# Altium PCB STM32f0DemoBoard.PcbDoc
Units mm, origin at the board's own origin, x right, y up, seen from the top; angles counter-clockwise.
Board outline 36.2 x 24.5 mm, 2 copper layers (Top Layer, Bottom Layer), stack 1.671 mm thick; 17 components, 31 nets, 93 pads, 13 vias.
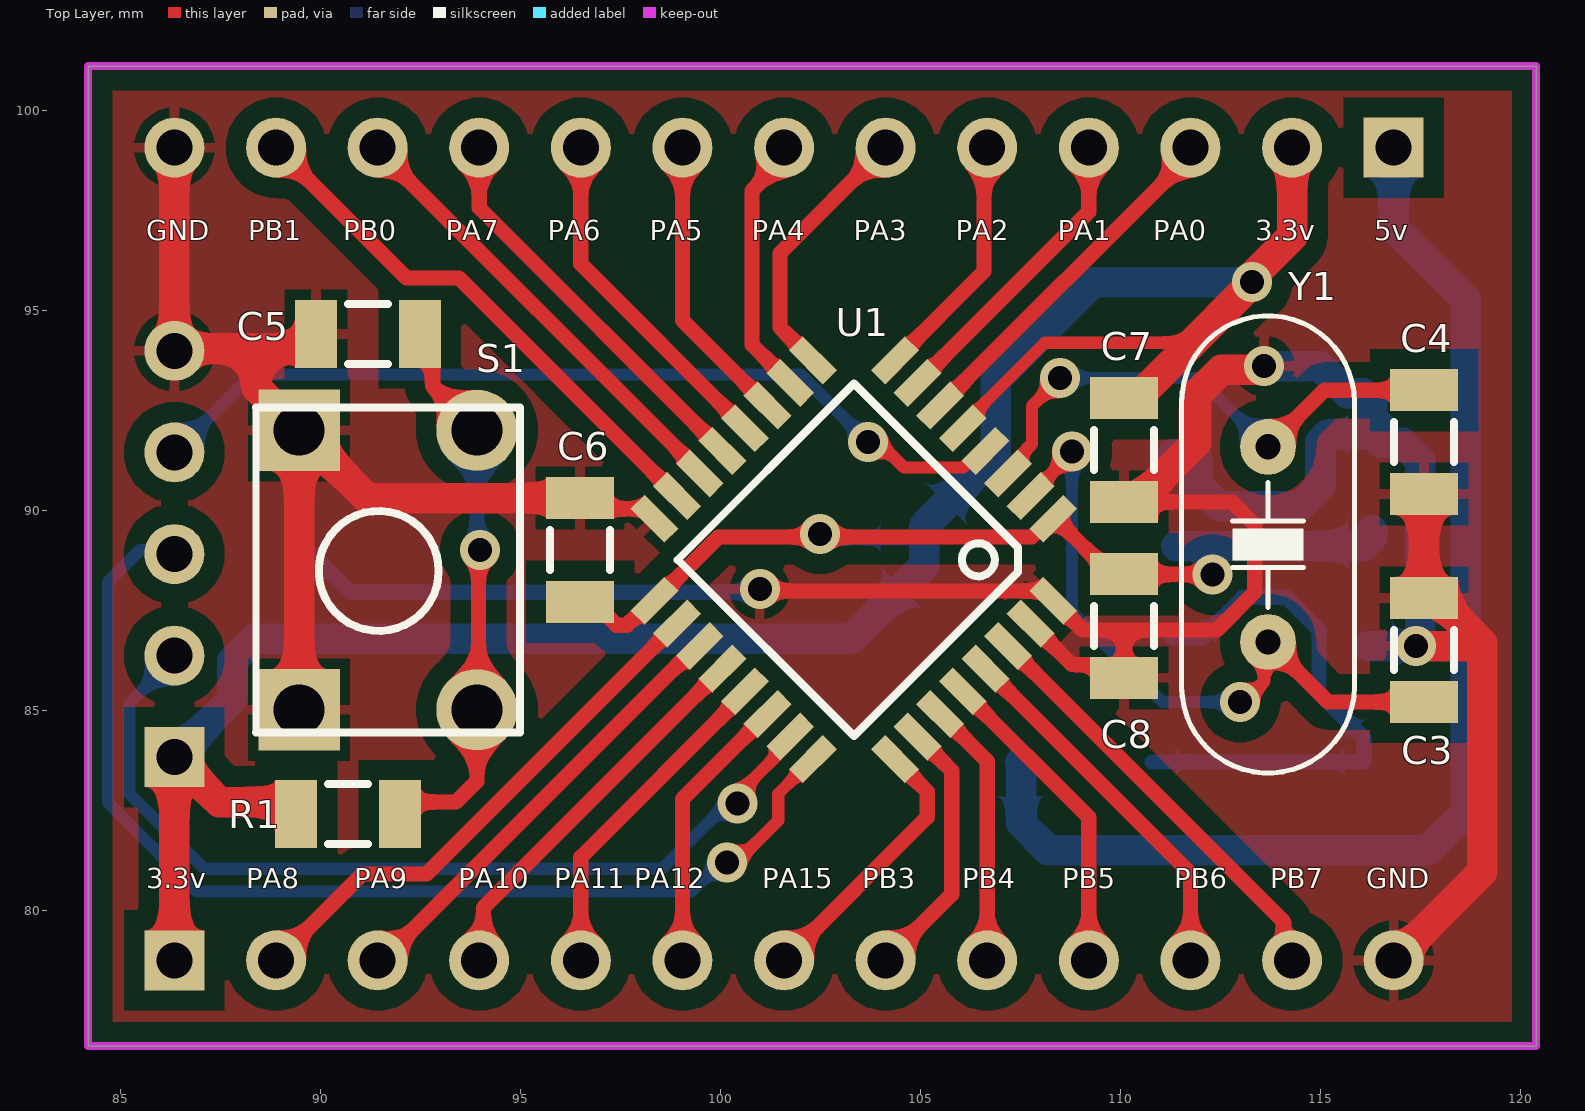
[diagram p0: Top Layer view]
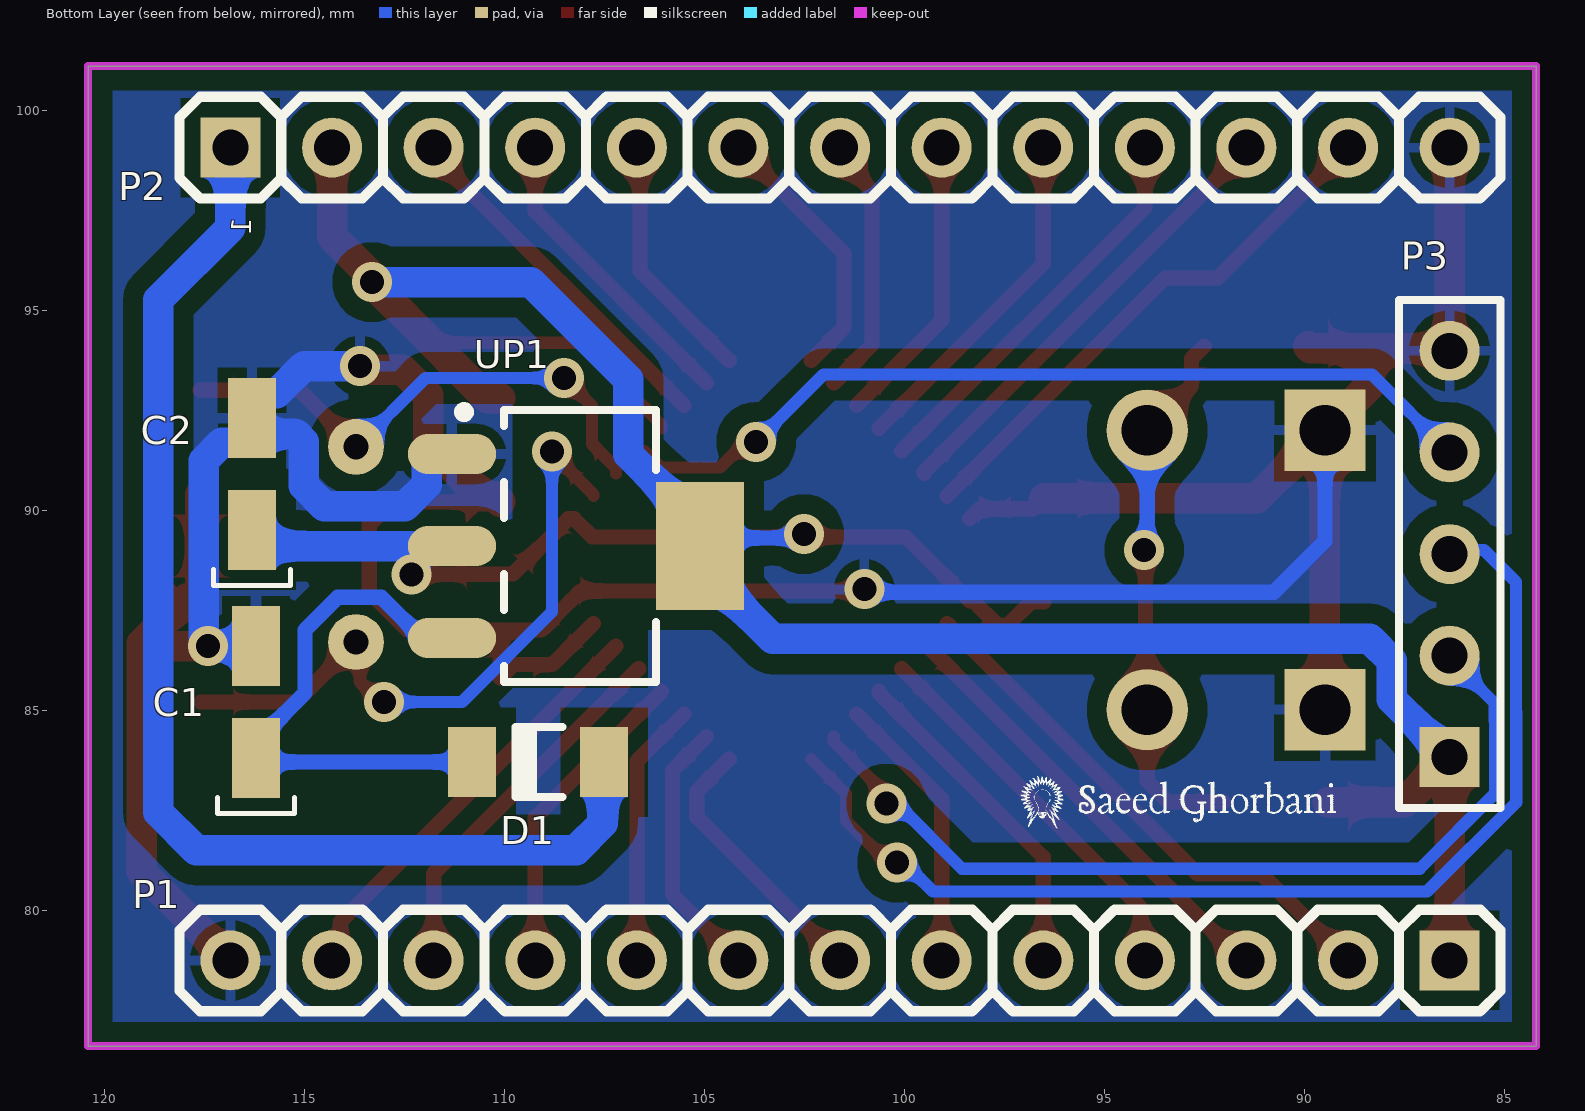
[diagram p1: Bottom Layer view, seen from below]

## Layer stack, top to bottom
Top Solder: solder mask 0.0102, Solder Resist, Dk 3.5
Top Layer: signal copper 0.0356
Dielectric 1: dielectric 1.6, FR-4, Dk 4.8
Bottom Layer: signal copper 0.0356
Bottom Solder: solder mask 0.0102, Solder Resist, Dk 3.5

## Board outline
84.2,76.6 84.2,101.1 120.4,101.1 120.4,76.6

## Design rules (kind name [scope] priority, off if disabled: settings)
Clearance Clearance_Polygon [InPolygon] p1: gap=0.5 ignorepadtopadclearanceinfootprint=FALSE
Clearance [All] p2: gap=0.229 ignorepadtopadclearanceinfootprint=FALSE
PolygonConnect [All] p1: connectstyle=Relief reliefconductorwidth=0.254 reliefentries=4 polygonreliefangle="90 Angle" airgapwidth=0.254
RoutingVias [All] p1: holewidth=0.711 width=1.27 viastyle="Through Hole" minholewidth=0.711 minwidth=1.27 maxholewidth=0.711 maxwidth=1.27
SolderMaskExpansion [All] p1: expansion=0.102 istentingtop=FALSE
Width [All] p1: maxlimit=0.762 minlimit=0.305 preferedwidth=0.508
30 further rules are at their usual default settings.

## Classes and differential pairs
component class STM32f0DemoBoard: C1 C2 C3 C4 C5 C6 C7 C8 D1 P1 P2 P3 R1 S1 UP1 Y1

## Components (designator, comment, footprint, x,y, rotation, side; value= is the part's Value field where it differs from the comment)
C1 "1uF" "CAPP 1206 (3216X18L) Size A" 116.2,83.8 r90 bottom
C2 "1uF" "CAPP 1206 (3216X18L) Size A" 116.3,89.5 r90 bottom
C3 "22pF" SMD_CAP_1206 117.6,87.8 r270 top
C4 "22pF" SMD_CAP_1206 117.6,90.4 r90 top
C5 "100nF" SMD_CAP_1206 92.496,94.4 r180 top
C6 "100nF" SMD_CAP_1206 96.5,87.704 r90 top
C7 "100nF" SMD_CAP_1206 110.1,92.8 r270 top
C8 "100nF" SMD_CAP_1206 110.1,88.4 r270 top
D1 "1N4148" "Diode 1n4148 SMD" 107.5,83.7 r0 bottom
P1 "MHDR_1X13" MHDR1X13-254P 86.359,78.74 r0 bottom
P2 "MHDR_1X13" MHDR1X13-254P 116.84,99.06 r180 bottom
P3 "STLINK" HDR1X5 86.36,83.82 r90 bottom
R1 "100K" "RES 1206 (3216X08L)" 91.996,82.4 r180 top
S1 "Switch PB" "Switch - Push to On" 91.7,88.5 r90 top
U1 "STM32F030K6T6" LQFP-32 103.346,88.757 r225 top
UP1 "3V3" SOT223 108.1,89.1 r180 bottom
Y1 "8 MHz" "CRYSTAL Small" 113.7,89.14 r270 top

## Footprints (in the part's own frame and the unit in brackets; to place one, negate y for a bottom-side part, rotate by r counter-clockwise, add the part's x,y. Pads: shape width x height; smd on the part's side, far side on the other; paste and mask are expansions set on the pad)
"CAPP 1206 (3216X18L) Size A" [mm] "Chip Capacitor, 2-Leads, Body 3.2x1.6mm, IPC High Density, chip Tantalum"
  rect 1.999x1.199 smd: 1(0,0) 2(2.8,0)
  silkscreen extent -1.38,-0.97 -0.99,0.97, body extent -0.43,-0.9 3.21,0.9, height 1.8
"CRYSTAL Small" [mil] "DESIGNER ABBAS BASEREH"
  round 55 hole 25: 1(-96.06,0) 2(96.06,0)
  silkscreen extent -225,-85 225,85, body extent -226,-89 226,89, height 142
"Diode 1n4148 SMD" [mm] "Mini MELF SOD-80"
  rect 1.2x1.75 smd: 1(0,0) 2(3.3,0)
  silkscreen extent 1.04,-0.88 2.22,0.87, body extent -0.13,-0.75 3.37,0.75, height 1.55
HDR1X5 [mm] "Connector; Header; 5 Position"
  rect 1.5x1.5 hole 0.9: 1(0,0)
  round 1.5 hole 0.9: 2(2.54,0) 3(5.08,0) 4(7.62,0) 5(10.16,0)
  silkscreen extent -1.27,-1.27 11.43,1.27, body extent -1.28,-1.27 11.42,1.27, height 8.38
LQFP-32 [mm]
  rect 1.2x0.5 smd: 1(-4.25,2.8) 2(-4.25,2) 3(-4.25,1.2) 4(-4.25,0.4) 5(-4.25,-0.4) 6(-4.25,-1.2) 7(-4.25,-2) 8(-4.25,-2.8) 17(4.25,-2.8) 18(4.25,-2) 19(4.25,-1.2) 20(4.25,-0.4) 21(4.25,0.4) 22(4.25,1.2) 23(4.25,2) 24(4.25,2.8)
  rect 0.5x1.2 smd: 9(-2.8,-4.25) 10(-2,-4.25) 11(-1.2,-4.25) 12(-0.4,-4.25) 13(0.4,-4.25) 14(1.2,-4.25) 15(2,-4.25) 16(2.8,-4.25) 25(2.8,4.25) 26(2,4.25) 27(1.2,4.25) 28(0.4,4.25) 29(-0.4,4.25) 30(-1.2,4.25) 31(-2,4.25) 32(-2.8,4.25)
  silkscreen extent -3.12,-3.12 3.12,3.12, body extent -4.54,-4.54 4.54,4.54, height 1.43
MHDR1X13-254P [mm] "Male Header 1X13 with 2.54 mm Pitch"
  rect 1.5x1.5 hole 0.9: 1(0,0)
  round 1.5 hole 0.9: 2(2.54,0) 3(5.08,0) 4(7.62,0) 5(10.16,0) 6(12.7,0) 7(15.24,0) 8(17.78,0) 9(20.32,0) 10(22.86,0) 11(25.4,0) 12(27.94,0) 13(30.48,0)
  silkscreen extent -1.27,-1.27 31.75,1.27, body extent -1.27,-1.27 31.75,1.27, height 8.43
"RES 1206 (3216X08L)" [mm] "Chip Resistor, 2-Leads, Body 3.2x1.6mm, IPC High Density _ (0.125 W)"
  rect 1.05x1.7 smd: 1(0,0) 2(2.596,0)
  silkscreen extent 0.8,-0.75 1.8,0.75, body extent -0.23,-0.76 2.82,0.76, height 0.6
SMD_CAP_1206 [mm]
  rect 1.05x1.7 smd: 1(0,0) 2(2.596,0)
  silkscreen extent 0.8,-0.75 1.8,0.75, body extent -0.22,-0.77 2.82,0.75, height 0.75
SOT223 [mm] "SOT223, 4-Leads, Body 6.5x3.5mm, Pitch 2.30mm-Designer Abbas Basereh"
  oval 2.2x1 smd: 1(-3.2,2.3) 2(-3.2,0) 3(-3.2,-2.3)
  rect 2.2x3.2 smd: 4(3,0)
  Top Layer pour cut-out: -1.7,3.556 1.7,3.556 1.7,-3.556 -1.7,-3.556
  silkscreen extent -3.03,-3.4 1.9,3.47, body extent -3.5,-3.25 3.5,3.25, height 1.7
"Switch - Push to On" [mil]
  rect 80x80 hole 50: 1(-137.5,87.5) 1(137.5,87.5)
  round 80 hole 50: 2(-137.5,-87.5) 2(137.5,-87.5)
  silkscreen extent -160,-130 160,130, body extent -155,-121 157,123, height 205

## Part data
C1 C2: library part Cap-Polar, "Polar Capacitor", Voltage=16V, Adding Date=1387/12/20, Designer="Saeid Jorablo", Organazation=ControTec
C3 C4 C5 C6 C7 C8: library part Cap-Bipolar, "Bipolar Capacitor", Voltage=100V, Adding Date=1387/12/20, Designer="Saeid Jorablo", Organazation=ControTec
D1: library part "1N4148 SMD", "General Semicoductor"
P1 P2: "Male Header 1X13"
P3: library part "Header 5", "Header, 5-Pin", LatestRevisionDate=17-Jul-2002, LatestRevisionNote="Re-released for DXP Platform.", Publisher="Altium Limited"
R1: library part Resistor, "Resistor", Power="1/8 W", Tolerance=5%
S1: "Push Button Switch"
U1: "STMICROELECTRONICS - STM32F030K6T6 - ARM MCU, Value Line, STM32 Family STM32F0 Series Microcontrollers, ARM Cortex-M0, 32bit, 48 MHz", Case/Package=LQFP, Frequency=48MHz, Manufacturer=STMicroelectronics, Max Operating Temperature=85°C, Max Power Dissipation=357mW, Max Supply Voltage=3.6V, Min Operating Temperature=-40°C, Min Supply Voltage=2.4V, Operating Supply Voltage=3.3V, Package Quantity=250, Supplier Part Number 1=497-14046-ND, Category=Microcontrollers, ComponentLink1Description=https://datasheet.ciiva.com/29987/dm00088500-29987017.pdf?src-supplier=Avnet, ComponentLink1URL=https://datasheet.ciiva.com/29987/dm00088500-29987017.pdf?src-supplier=Avnet, ComponentLink2Description=https://datasheet.ciiva.com/46427/1792126-46427291.pdf?src-supplier=Element14, ComponentLink2URL=https://datasheet.ciiva.com/46427/1792126-46427291.pdf?src-supplier=Element14, Contact Plating=Tin, Core Architecture=ARM, Data Bus Width=32b, Height=1.45mm, Interface=I2C,SPI,UART,USART, Lead Free="Lead Free", Length=7.2mm, Manufacturer Part Number=STM32F030K6T6, Max Frequency=48MHz, Memory Size=32KB, Memory Type=FLASH, Number of ADC Channels=12, Number of I2C Channels=1, Number of I/Os=26, Number of Pins=32, Number of Programmable I/O=26, Number of SPI Channels=1, Number of Timers/Counters=5, Oscillator Type=Internal, Packaging=Tray, Peripherals=POR,PWM,WDT,DMA, Pricing 1="1=1/84000, 10=1/65000, 25=1/55640, 80=1/32600, 250=1/24512, 500=1/08948, 1000=1/03760 (USD)", Radiation Hardening=No, RAM Size=4KB, REACH SVHC="No SVHC", RoHS=Yes, RoHS Compliant=Yes, Supplier 1=Digi-Key, Watchdog Timer=Yes, Weight=0.027302oz, Width=7.2mm
UP1: library part AMS1117-x.x, "x.x Volt, 800mA Low-Dropout Linear Regulator, 4-pin SOT-223", Data=16-12-2016, Designer="Ali Hafizi"
Y1: library part XTAL, "XTAL Crystal", ComponentLink1Description=Datasheet, ComponentLink2Description=Reference, Design Date=2017-1-3, Designer="ABBAS BASEREH", Mounting Technology="Surface Mount\Through-Hole", Status=Unreleased

## Via types
v1: diameter 1, hole 0.6, Top Layer to Bottom Layer, tented both sides, 13 vias

## Nets (pads, with @x,y where several pads share a name; then routed paths per layer and width w, separated by ;. In a path a pad name is that pad's centre, name@x,y a point inside that pad or via, vN(x,y) a via of type N, cw(c..) or ccw(c..) an arc to the next point about the centre after c; other vN are vias at no path point)
3.3v: C2.1 C6.1 C7.1 C8.1 P1.1 P2.2 P3.1 R1.2 U1.1 U1.5 U1.17 UP1.2 UP1.4 | length 84.6
  Top Layer w0.305: U1.5 106.069,92.131 108.119,94.181 111.806,94.181 ; 111.325,93.7 111.363,93.738
  Top Layer w0.381: C6.1 96.825,87.704 97.407,87.122 97.668,87.122 98.277,87.731 U1.17 99.957,89.328 107.793,89.328 108.247,89.782 U1.1 108.393,89.782 109.775,88.4 C8.1 110.107,88.393 112.307,88.393 v1(112.314,88.386)
  Top Layer w0.762: P1.1 P3.1 87.48,82.7 R1.2@89.404,82.7 ; C7.1 110.425,92.8 111.325,93.7 ; 111.363,93.738 111.561,93.936 113.3,95.675 113.3,95.837 114.3,96.837 P2.2
  Bottom Layer w0.381: v1(102.5,89.4) 102.6,89.3 104.9,89.3 UP1.4 ; UP1.2 111.75,89.1 112.099,88.751 112.099,88.601 v1(112.314,88.386)
  Bottom Layer w0.762: P3.1 87.807,85.267 87.807,86.231 88.353,86.777 103.277,86.777 105.1,88.6 UP1.4 105.1,89.6 106.897,91.397 106.897,93.266 109.331,95.7 v1(113.3,95.7) ; UP1.2@111.4,89.1 116.082,89.1 116.3,89.318 C2.1
E5v: D1.1 P2.1 | length 30.7
  Bottom Layer w0.762: D1.1 107.534,83.666 107.534,82.166 108.2,81.5 117.7,81.5 118.645,82.445 118.645,95.255 116.84,97.06 P2.1
GND: C1.2 C2.2 C3.1 C4.1 C5.2 C6.2 C7.2 C8.2 P1.13 P2.13 P3.5 S1.1 U1.16 U1.31 U1.32 UP1.1 | length 105.3
  Top Layer w0.381: C6.2 96.771,90.029 98.114,90.029 U1.16 ; v1(100.993,88.022) 101.036,87.979 108.084,87.979 U1.32 109.063,87 110.1,87 ; U1.31 108.793,86.139 109.766,86.139 C8.2 110.1,87 ; C7.2@110.569,90.2 112.8,90.2 113.368,89.632 113.368,87.949 112.419,87 110.1,87
  Top Layer w0.762: P2.13 P3.5 86.42,94.04 88.4,94.04 ; S1.1@89.477,85.008 S1.1@89.477,91.993 ; C5.2@89.9,94.1 89.84,94.04 88.4,94.04 ; C6.2 91.17,90.3 S1.1@89.477,91.993 ; C7.2 110.244,90.348 110.569,90.348 111.9,91.679 111.9,92.874 112.529,93.503 113.503,93.503 v1(113.6,93.6) ; P1.13 119.06,80.96 119.06,86.665 ; v1(117.4,86.6) 118.994,86.6 119.06,86.665 ; C4.1 C3.1 117.925,87.8 119.06,86.665 ; 88.4,94.04 88.4,93.07 S1.1@89.477,91.993
  Bottom Layer w0.381: S1.1@89.477,91.993 89.477,89.223 90.754,87.946 100.918,87.946 v1(100.993,88.022)
  Bottom Layer w0.762: UP1.1 111.824,91.4 111.934,91.29 111.934,90.635 112.479,90.091 114.491,90.091 115.008,90.608 115.008,91.708 115.2,91.9 C2.2@116.3,91.9 ; v1(113.6,93.6) 115,93.6 115.682,92.918 116.082,92.918 116.3,92.7 C2.2 116.518,92.081 116.518,91.681 117.063,91.681 117.509,91.235 117.509,86.847 117.497,86.835 117.497,86.602 117.5,86.6 C1.2 v1(117.4,86.6)
NetC1_1: C1.1 D1.2 UP1.3 | length 13.5
  Bottom Layer w0.381: D1.2 116.1,83.7 116.1,84.3 114.977,85.423 114.977,87.004 114.163,87.818 113.068,87.818 112.051,86.8 UP1.3
NetP3_2: P3.2 U1.23 | length 22.8
  Top Layer w0.305: v1(100.439,82.661) 100.439,82.883 101.755,84.199 U1.23
  Bottom Layer w0.305: P3.2 86.36,86.295 85.233,85.168 85.233,84.732 85.229,84.728 85.229,82.912 87.108,81.033 98.55,81.033 100.177,82.661 v1(100.439,82.661)
NetP3_3: P3.3 U1.24 | length 27.9
  Top Layer w0.305: v1(100.174,81.186) 100.4,81.186 101.455,82.24 101.455,82.905 U1.24
  Bottom Layer w0.305: P3.3 86.26,89 85.5,89 84.7,88.2 84.7,84.953 84.696,84.949 84.696,82.691 86.926,80.46 99.276,80.46 100.002,81.186 v1(100.174,81.186)
NetP3_4: P3.4 U1.4 | length 22.2
  Top Layer w0.305: v1(103.7,91.7) 103.961,91.7 104.598,91.063 106.08,91.063 106.496,91.479 U1.4
  Bottom Layer w0.305: P3.4 86.36,91.446 88.304,93.39 102.01,93.39 v1(103.7,91.7)
NRST: C5.1 R1.1 S1.2 | length 13.7
  Top Layer w0.381: R1.1@92,82.7 93.4,82.7 93.922,83.222 93.922,85.008 93.961,85.046 93.961,88.961 v1(94,89) ; C5.1@92.496,94.1 92.81,93.786 92.81,93.105 S1.2@93.922,91.993
  Bottom Layer w0.381: S1.2@93.922,91.993 93.922,89.078 v1(94,89)
OCS_IN: C3.2 U1.2 Y1.2 | length 17.1
  Top Layer w0.305: U1.2 107.766,90.39 108.799,91.423 v1(108.799,91.465) ; v1(113,85.2) 113.1,85.2 113.6,85.7 113.6,86.6 Y1.2
  Top Layer w0.381: Y1.2 115.196,85.204 C3.2
  Bottom Layer w0.305: v1(108.799,91.465) 108.799,87.455 111.054,85.2 v1(113,85.2)
OCS_OUT: C4.2 U1.3 Y1.1 | length 13.3
  Top Layer w0.305: U1.3 107.2,91.051 107.8,91.651 107.8,92.6 v1(108.5,93.3)
  Top Layer w0.381: Y1.1 115.116,92.996 C4.2
  Bottom Layer w0.305: v1(108.5,93.3) 111.961,93.3 113.681,91.58 Y1.1
PA0: P2.3 U1.6 | length 9
  Top Layer w0.381: U1.6 111.76,98.867 P2.3
PA1: P2.4 U1.7 | length 7.7
  Top Layer w0.381: U1.7 109.22,97.459 P2.4
PA2: P2.5 U1.8 | length 6.3
  Top Layer w0.381: U1.8 106.6,95.97 106.6,98.98 P2.5
PA3: P2.6 U1.9 | length 6.8
  Top Layer w0.381: U1.9 101.5,94.563 101.5,96.42 P2.6
PA4: P2.7 U1.10 | length 6.6
  Top Layer w0.381: P2.7 101.6,98.791 100.8,97.991 100.8,94.131 U1.10
PA5: P2.8 U1.11 | length 7.3
  Top Layer w0.381: P2.8 99.06,94.74 U1.11
PA6: P2.9 U1.12 | length 8.7
  Top Layer w0.381: P2.9 96.52,96.149 U1.12
PA7: P2.10 U1.13 | length 10.1
  Top Layer w0.381: P2.10 93.98,97.557 U1.13
PA8: P1.2 U1.18 | length 13.5
  Top Layer w0.381: P1.2 91.059,80.9 92.661,80.9 U1.18
PA9: P1.3 U1.19 | length 11.3
  Top Layer w0.381: P1.3 91.548,78.74 99.408,86.6 U1.19
PA10: P1.4 U1.20 | length 9.8
  Top Layer w0.381: P1.4 94.085,78.846 94.085,80.062 U1.20
PA11: P1.5 U1.21 | length 8.4
  Top Layer w0.381: P1.5 96.519,81.319 100.624,85.424 U1.21
PA12: P1.6 U1.22 | length 7
  Top Layer w0.381: P1.6 99.059,82.773 U1.22
PA15: P1.7 U1.25 | length 6.8
  Top Layer w0.381: P1.7 105.18,82.321 105.18,82.963 U1.25
PB0: P2.11 U1.14 | length 11.5
  Top Layer w0.381: P2.11 91.44,99.013 99.493,90.96 U1.14
PB1: P2.12 U1.15 | length 13.6
  Top Layer w0.381: P2.12 92.16,95.8 93.475,95.8 U1.15
PB3: P1.8 U1.26 | length 6.6
  Top Layer w0.381: P1.8 105.79,80.391 105.79,83.485 U1.26
PB4: P1.9 U1.27 | length 6.7
  Top Layer w0.381: U1.27 106.679,83.727 P1.9
PB5: P1.10 U1.28 | length 8
  Top Layer w0.381: U1.28 109.219,82.318 P1.10
PB6: P1.11 U1.29 | length 9.4
  Top Layer w0.381: U1.29 111.759,80.909 P1.11
PB7: P1.12 U1.30 | length 10.8
  Top Layer w0.381: U1.30 114.085,79.715 114.085,78.954 P1.12

## Polygon pours and split planes (outlines as drawn)
GND on Bottom Layer "NONET_L01_P-001" (solid, remove dead copper, pour order 0): 84.2,76.6 84.2,101.1 120.4,101.1 120.4,76.6
GND on Top Layer "NONET_L01_P-001" (solid, remove dead copper, pour order 1): 84.2,76.6 84.2,101.1 120.4,101.1 120.4,76.6

## Keep-outs
Keep-Out Layer:
  the board outline again, w0.2

## Silkscreen, mask and mechanical layers (free items; w line width, h text height)
Top Overlay:
  text "GND" at 85.65,96.75 h0.5
  text "PB1" at 88.201,96.75 h0.5
  text "PB0" at 90.586,96.75 h0.5
  text "PA7" at 93.138,96.75 h0.5
  text "PA6" at 95.689,96.75 h0.5
  text "PA5" at 98.24,96.75 h0.5
  text "PA4" at 100.792,96.75 h0.5
  text "PA3" at 103.343,96.75 h0.5
  text "PA2" at 105.894,96.75 h0.5
  text "PA1" at 108.446,96.75 h0.5
  text "PA0" at 110.831,96.75 h0.5
  text "3.3v" at 113.382,96.75 h0.5
  text "5v" at 116.35,96.75 h0.5
  text "3.3v" at 85.65,80.55 h0.5
  text "PA8" at 88.15,80.55 h0.5
  text "PA9" at 90.85,80.55 h0.5
  text "PA10" at 93.45,80.55 h0.5
  text "PA11" at 95.85,80.55 h0.5
  text "PA12" at 97.85,80.55 h0.5
  text "PA15" at 101.05,80.55 h0.5
  text "PB3" at 103.55,80.55 h0.5
  text "PB4" at 106.05,80.55 h0.5
  text "PB5" at 108.55,80.55 h0.5
  text "PB6" at 111.35,80.55 h0.5
  text "PB7" at 113.75,80.55 h0.5
  text "GND" at 116.15,80.55 h0.5
Bottom Overlay:
  drawing of 18 lines, arcs and shapes, not listed

## Text inside footprints (layer, text, board x,y; h text height)
P2: Bottom Overlay "1" at 116.325,97.302 h0.5 r270